# Altium PCB Copy of AT long bus (13.3 x 4.2 inches).PCBDOC
Units mm, origin at the board's own origin, x right, y up, seen from the top; angles counter-clockwise.
Board outline 100 x 50 mm, 10 copper layers (TopLayer, MidLayer1, MidLayer2, MidLayer3, MidLayer4, MidLayer5, MidLayer6, MidLayer7, MidLayer8, BottomLayer); 21 components, 20 nets, 85 pads, 8 vias.
Unrouted connection lines stored in the file: 15.
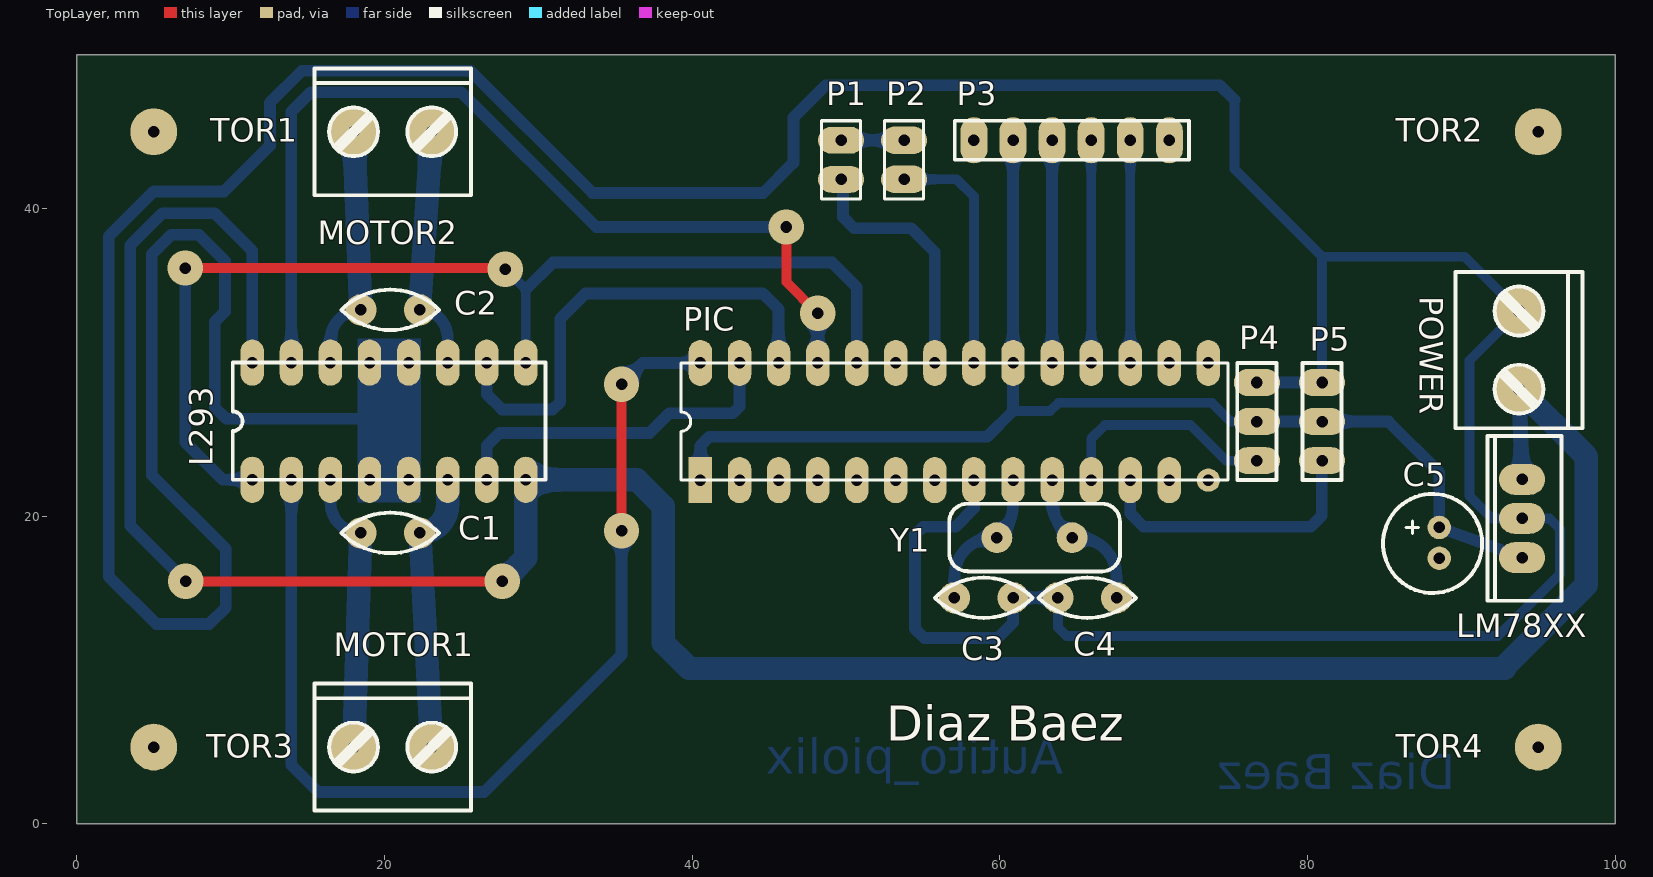
[diagram p0: TopLayer view]
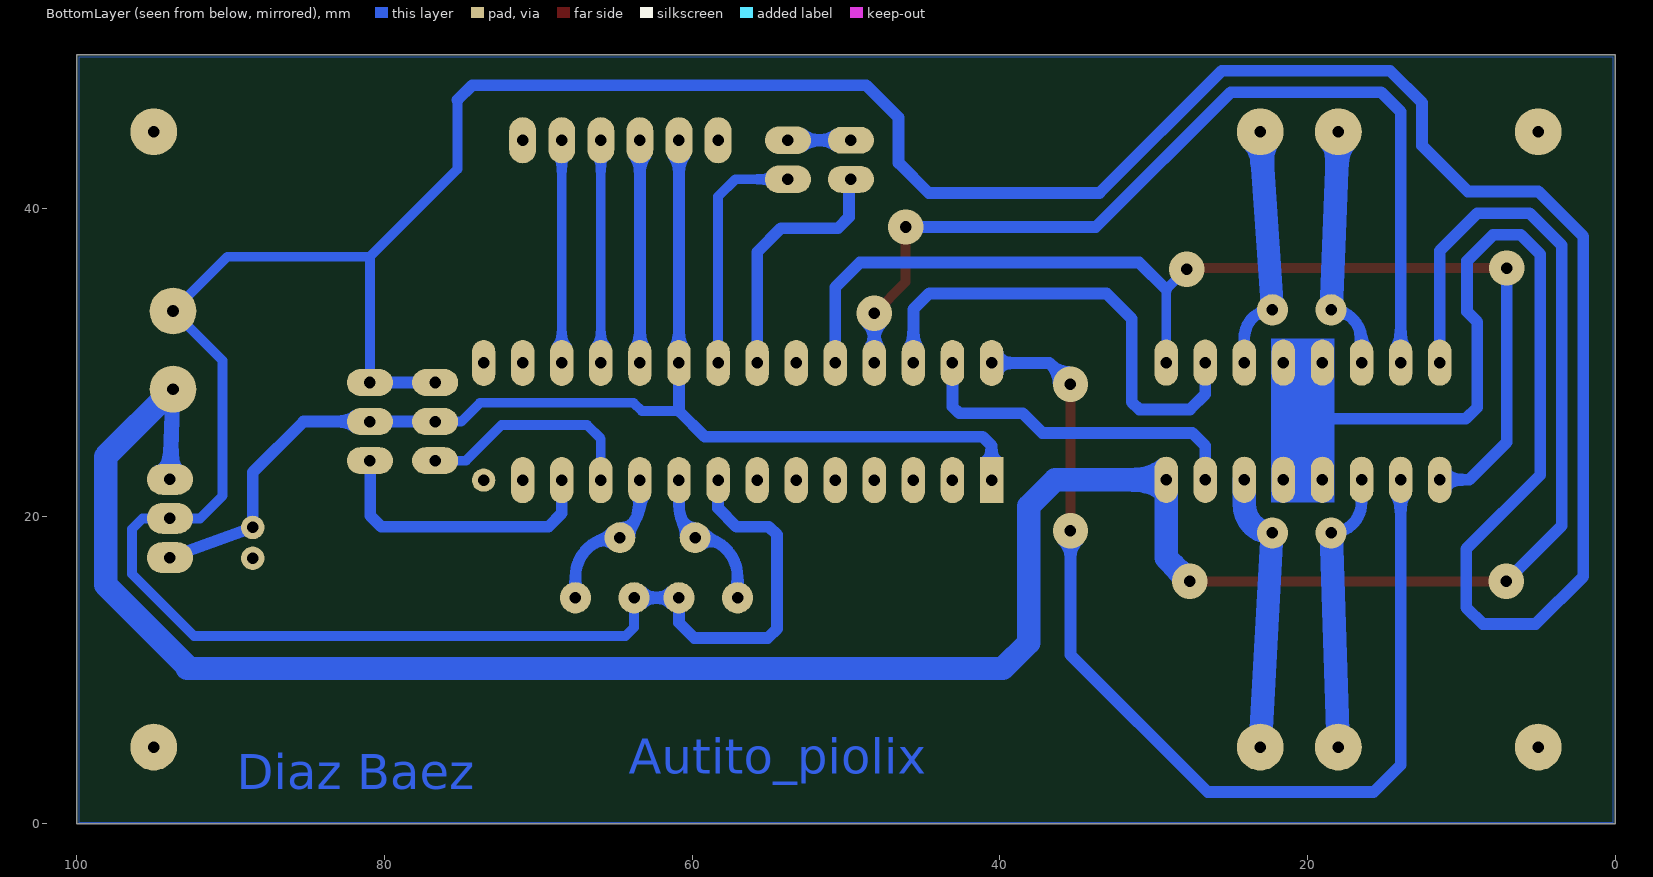
[diagram p1: BottomLayer view, seen from below]

## Layer stack, top to bottom
TopSolder: solder mask 0.0102, Solder Resist, Dk 3.5
TopLayer: signal copper 0.0356
Dielectric1: core 0.32, FR-4, Dk 4.8
MidLayer1: signal copper 0.0356
Dielectric2: prepreg 0.32, FR-4, Dk 4.8
MidLayer2: signal copper 0.0356
Dielectric3: core 0.32, FR-4, Dk 4.8
MidLayer3: signal copper 0.0356
Dielectric4: prepreg 0.32, FR-4, Dk 4.8
MidLayer4: signal copper 0.0356
Dielectric5: core 0.32, FR-4, Dk 4.8
MidLayer5: signal copper 0.0356
Dielectric6: prepreg 0.32, FR-4, Dk 4.8
MidLayer6: signal copper 0.0356
Dielectric7: core 0.32, FR-4, Dk 4.8
MidLayer7: signal copper 0.0356
Dielectric8: prepreg 0.32, FR-4, Dk 4.8
MidLayer8: signal copper 0.0356
Dielectric9: core 0.32, FR-4, Dk 4.8
BottomLayer: signal copper 0.0356
BottomSolder: solder mask 0.0102, Solder Resist, Dk 3.5

## Board outline
0,0 100,0 100,50 0,50

## Design rules (kind name [scope] priority, off if disabled: settings)
Clearance [All] p1: gap=0.635 ignorepadtopadclearanceinfootprint=FALSE
FabricationTestPointUsage TestPointUsage [All] p1: valid=0 allowmultiple=FALSE
FabricationTestpoint Testpoint [All] p1: side=3 testpointundercomponent=TRUE minsize=1.016 maxsize=2.54 preferedsize=1.524 minholesize=0.508 maxholesize=1.016 preferedholesize=0.813 testpointgrid=0.025 allowsidetop=TRUE allowsidebottom=TRUE usegrid=TRUE gridtolerance=0
PasteMaskExpansion PasteMaskExpansion_1 [InComponent('P1')] p1: expansion=-3.81
PasteMaskExpansion [All] p2: expansion=0
PlaneClearance [All] p1: clearance=0.254
PolygonConnect [All] p1: connectstyle=Relief reliefconductorwidth=0.254 reliefentries=4 polygonreliefangle="90 Angle" airgapwidth=0.254
RoutingVias [All] p1: holewidth=0.711 width=1.27 viastyle="Through Hole" minholewidth=0.711 minwidth=1.27 maxholewidth=0.711 maxwidth=1.27
SilkToSolderMaskClearance SilkscreenOverComponentPads [IsPad] p1: minsilkscreentomaskgap=0.254 clearancetoexposedcopper=TRUE
SolderMaskExpansion [All] p1: expansion=0.051
Width [All] p1: maxlimit=7.62 minlimit=0.508 preferedwidth=0.635
25 further rules are at their usual default settings.

## Classes and differential pairs
component class "AT long bus (13.3 x 4.2 inches)": C1 C2 C3 C4 C5 CI1 MOTOR2 P1 P5 PIC POWER TOR2 TOR3 TOR4 U2 Y1

## Components (designator, comment, footprint, x,y, rotation, side; value= is the part's Value field where it differs from the comment)
C1 "100nF" CAP0.15 18.466,18.923 r270 top
C2 "100nF" CAP0.15 18.466,33.426 r270 top
C3 "22pF" CAP0.15 60.858,14.707 r90 top
C4 "22pF" CAP0.15 63.779,14.707 r270 top
C5 "Cap Pol" "ELECTROLITICO 5X10" 88.57,19.279 r270 top value=220uF
L293 "L293" DIP16 11.405,22.377 r90 top (schematic designator CI1)
LM78XX "LM78LXX" TO220 93.955,19.863 r90 top (schematic designator U2)
MOTOR1 "MOTOR1" "BORNERA2 azul" 17.989,5 r0 top (schematic designator P1)
MOTOR2 "MOTOR2" "BORNERA2 azul" 17.989,45 r0 top (schematic designator P2)
P1 "LUZ2" HEADER1X2#1 49.682,41.91 r90 top (schematic designator P11)
P2 "LUZ1" HEADER1X2#2 53.772,41.91 r90 top (schematic designator P10)
P3 "HC-05" "Header 1X6" 71.018,44.45 r180 top (schematic designator P4)
P4 "SERVO1" "Header 1X3" 76.708,23.622 r90 top (schematic designator P8)
P5 "SERVO2" "Header 1X3" 80.95,23.622 r90 top (schematic designator P9)
PIC "PIC16F876A-I/SO" DIP28 40.538,22.352 r90 top (schematic designator U1)
POWER "POWER IN" "BORNERA2 azul" 93.751,33.35 r270 top (schematic designator P12)
TOR1 "POWER IN" TORNILLO 5,45 r0 top (schematic designator P3)
TOR2 "POWER IN" TORNILLO 95,45 r0 top (schematic designator P5)
TOR3 "POWER IN" TORNILLO 5,5 r0 top (schematic designator P7)
TOR4 "POWER IN" TORNILLO 95,5 r0 top (schematic designator P6)
Y1 "5M" HP49-S 59.814,18.618 r0 top

## Footprints (in the part's own frame and the unit in brackets; to place one, negate y for a bottom-side part, rotate by r counter-clockwise, add the part's x,y. Pads: shape width x height; smd on the part's side, far side on the other; paste and mask are expansions set on the pad)
"BORNERA2 azul" [mil]
  round 120 hole 29.53: 1(0,0) 2(200,0)
  silkscreen extent -100,-162 300,162, body extent -117,-122 300,178, height 394
CAP0.15 [mil]
  round 80 hole 29.53: 1(0,0) 2(0,150)
  silkscreen extent -52,-50 52,200, body extent -40,-22 39,172, height 267
DIP16 [mm]
  oval 3x1.524 hole 0.75: 1(0,0) 2(0,-2.54) 3(0,-5.08) 4(0,-7.62) 5(0,-10.16) 6(0,-12.7) 7(0,-15.24) 8(0,-17.78) 9(7.62,-17.78) 10(7.62,-15.24) 11(7.62,-12.7) 12(7.62,-10.16) 13(7.62,-7.62) 14(7.62,-5.08) 15(7.62,-2.54) 16(7.62,0)
  silkscreen extent 0,-19.05 7.62,1.27, body extent -0.04,-19.33 7.72,1.27, height 4.5
DIP28 [mm]
  rect 3x1.524 hole 0.75: 1(0,0)
  oval 3x1.524 hole 0.75: 2(0,-2.54) 3(0,-5.08) 4(0,-7.62) 5(0,-10.16) 6(0,-12.7) 7(0,-15.24) 8(0,-17.78) 9(0,-20.32) 10(0,-22.86) 11(0,-25.4) 12(0,-27.94) 13(0,-30.48) 15(7.62,-33.02) 16(7.62,-30.48) 17(7.62,-27.94) 18(7.62,-25.4) 19(7.62,-22.86) 20(7.62,-20.32) 21(7.62,-17.78) 22(7.62,-15.24) 23(7.62,-12.7) 24(7.62,-10.16) 25(7.62,-7.62) 26(7.62,-5.08) 27(7.62,-2.54) 28(7.62,0)
  oval 1.5x1.524 hole 0.75: 14(0,-33.02)
  silkscreen extent 0,-34.29 7.62,1.27, body extent 0.1,-34.06 7.92,0.99, height 4.57
"ELECTROLITICO 5X10" [mil]
  round 60 hole 29.53: 1(0,0) 2(78.74,0)
  silkscreen extent -16,-85 16,-53, body extent -60,-99 139,99, height 123
HEADER1X2#1 [mm] "Connector; Header; 2 Position"
  oval 1.75x3 hole 0.75: 1(0,0) 2(2.54,0)
  silkscreen extent -1.27,-1.27 3.81,1.27, body extent -1.27,-1.27 3.81,1.27, height 8.44
HEADER1X2#2 [mm] "Connector; Header; 2 Position"
  oval 1.784x3 hole 0.75: 1(0,0) 2(2.54,0)
  silkscreen extent -1.27,-1.27 3.81,1.27, body extent -1.27,-1.27 3.81,1.27, height 8.44
"Header 1X3" [mm]
  oval 1.75x3 hole 0.75: 1(0,0) 2(2.54,0) 3(5.08,0)
  silkscreen extent -1.27,-1.27 6.35,1.27, body extent -1.27,-1.52 6.35,1.4, height 8.51
"Header 1X6" [mm]
  oval 1.75x3 hole 0.75: 1(0,0) 2(2.54,0) 3(5.08,0) 4(7.62,0) 5(10.16,0) 6(12.7,0)
  silkscreen extent -1.27,-1.27 13.95,1.27, body extent -1.27,-1.52 13.97,1.4, height 8.51
HP49-S [mm]
  round 2 hole 0.75: 1(0,0) 2(4.88,0)
  silkscreen extent -3.1,-2.2 8,2.2, body extent -3.23,-2.33 8.12,2.32, height 3.5
TO220 [mm]
  oval 2x3 hole 0.75: 1(-2.54,0) 2(0,0) 3(2.54,0)
  silkscreen extent -5.35,-2.55 5.35,2.25, body extent -4.95,-2.09 4.95,2.41, height 25.66
TORNILLO [mil]
  round 120 hole 29.53: 1(0,0)
  body extent -110,-114 110,107, height 94

## Part data
C1 C2 C3 C4: library part CAP
C5: "Polarized Capacitor (Surface Mount)", LatestRevisionDate=17-Jul-2002, LatestRevisionNote="Re-released for DXP Platform.", PackageReference=C0805, Published=8-Jun-2000, Publisher="Altium Limited"
L293: "Driver_Motor", Code_JEDEC=SOT-23, LatestRevisionDate=17-Jul-2002, LatestRevisionNote="Re-released for DXP Platform.", PackageReference=SOT-23B, Published=8-Jun-2000, Publisher="Altium Limited"
MOTOR1 MOTOR2 P1 P2 POWER: library part "Header 2", "Header, 2-Pin", LatestRevisionDate=17-Jul-2002, LatestRevisionNote="Re-released for DXP Platform.", Publisher="Altium Limited"
P3: library part "Header 6", "Header, 6-Pin", LatestRevisionDate=17-Jul-2002, LatestRevisionNote="Re-released for DXP Platform.", Publisher="Altium Limited"
P4 P5: library part "Header 3", "Header, 3-Pin", LatestRevisionDate=17-Jul-2002, LatestRevisionNote="Re-released for DXP Platform.", Publisher="Altium Limited"
PIC: "Enhanced FLASH Microcontroller, 8K (x14-Bit words) FLASH, 368 Bytes RAM, 28-Pin SOIC, Standard VDD Range, Industrial Temperature", Supplier Part Number 1=PIC16F876A-I/SO-ND, Code_JEDEC=MS-013, ComponentAvailability="Unknown. Contact manufacturer to determine status.", ComponentLink1Description=Datasheet, ComponentLink1URL=http://ww1.microchip.com/downloads/en/DeviceDoc/39582b.pdf, ComponentLink2Description="Packaging Specification", ComponentLink2URL=http://www.microchip.com/stellent/groups/techpub_sg/documents/packagingspec/en012702.pdf, ComponentLink3Description="Microchip.com Home", ComponentLink3URL=http://www.microchip.com/, DatasheetVersion="revB, Oct-2003", LatestRevisionDate=29-Jan-2009, LatestRevisionNote="Sch. layout revised. 3D Model Removed.", PackageDescription="28-Lead Plastic Small Outline (SO) - Wide 7.50mm Body [SOIC]", PackageReference=SOIC-SO28, PackageVersion="revBB, Aug-2009", Published=11-Oct-2004, Publisher="Altium Limited", Supplier 1=Digi-Key, Supplier 2=Farnell, Supplier 3=Farnell, Supplier Part Number 2=9761306, Supplier Part Number 3=1660040
TOR1 TOR2 TOR3 TOR4: library part "Header 1", "Header, 2-Pin", LatestRevisionDate=17-Jul-2002, LatestRevisionNote="Re-released for DXP Platform.", Publisher="Altium Limited"
Y1: library part XTAL, "Crystal Oscillator", LatestRevisionDate=17-Jul-2002, LatestRevisionNote="Re-released for DXP Platform.", PackageReference=R38, Published=8-Jun-2000, Publisher="Altium Limited"

## Via types
v1: diameter 2.3, hole 0.75, TopLayer to BottomLayer, 8 vias

## Nets (pads, with @x,y where several pads share a name; then routed paths per layer and width w, separated by ;. In a path a pad name is that pad's centre, name@x,y a point inside that pad or via, vN(x,y) a via of type N, cw(c..) or ccw(c..) an arc to the next point about the centre after c; other vN are vias at no path point)
+5: C5.1 LM78XX.1 P3.5 P4.2 P5.2 PIC.1 PIC.20 | length 80.2
  BottomLayer w0.635: 60.858,26.848 63.271,26.848 63.805,27.381 73.787,27.381 75.006,26.162 P4.2@76.556,26.162
  BottomLayer w0.762: PIC.1 40.538,24.587 41.123,25.171 59.182,25.171 60.858,26.848 PIC.20 P3.5 ; P4.2@76.556,26.162 P4.2 P5.2 85.268,26.162 88.57,22.86 C5.1 LM78XX.1
GND: C3.1 C4.1 C5.2 L293.4 L293.5 L293.12 L293.13 LM78XX.2 P1.2 P2.2 P3.4 P4.3 P5.3 PIC.8 PIC.19 POWER.1 | length 324.2
  BottomLayer w0.635: C4.1 63.779,12.776 64.338,12.217 92.38,12.217 96.418,16.256 96.418,19.177 95.733,19.863 LM78XX.2 91.999,19.863 90.526,21.336 90.526,30.124 POWER.1 90.221,36.881 80.975,36.881 ; 75.26,47.066 75.26,42.57 80.95,36.881 P5.3
  BottomLayer w0.762: 19.025,26.34 9.703,26.34 8.966,27.076 8.966,32.639 9.627,33.299 9.627,36.617 7.933,38.31 6.139,38.31 4.87,37.041 4.87,22.689 9.677,17.882 9.677,14.072 8.611,13.005 5.156,13.005 2.076,16.085 2.076,38.199 5,41.123 9.576,41.123 12.548,44.094 12.548,46.883 14.636,48.971 25.572,48.971 33.522,41.021 44.628,41.021 46.584,42.977 46.584,45.923 48.692,48.031 74.295,48.031 75.26,47.066 ; P1.2@49.809,44.45 P2.2 ; PIC.8 58.318,20.523 57.125,19.329 55.016,19.329 54.483,18.796 54.483,12.7 55.093,12.09 59.868,12.09 60.858,13.081 C3.1 C4.1 ; PIC.19 P3.4 ; P4.3@76.556,28.702 P5.3
  BottomLayer w1.524: L293.5 L293.4 19.025,26.34 L293.13 L293.12
NetC1_1: C1.1 L293.3 MOTOR1.1 | length 18.5
  BottomLayer w0.762: L293.3 16.485,22.301 16.485,21.412 16.485,20.904 ccw(c18.466,20.904) 18.449,18.923 ccw(c18.466,20.904) C1.1
  BottomLayer w1.524: MOTOR1.1 C1.1@18.449,18.923
NetC1_2: C1.2 L293.6 MOTOR1.2 | length 19.5
  BottomLayer w0.762: L293.6@24.105,21.26 L293.6@24.105,22.301
  BottomLayer w1.524: C1.2 ccw(c22.276,20.752) C1.2@22.304,18.923 ; C1.2@22.304,18.925 C1.2@22.304,18.923 ; MOTOR1.2 C1.2@22.304,18.923 ; L293.6 24.105,21.26 24.105,20.752 cw(c22.276,20.752) C1.2@22.304,18.923
NetC2_1: C2.1 L293.14 MOTOR2.1 | length 16.2
  BottomLayer w0.762: L293.14@16.485,29.921 L293.14 16.485,31.445 cw(c18.466,31.445) C2.1
  BottomLayer w1.524: MOTOR2.1 C2.1
NetC2_2: C2.2 L293.11 MOTOR2.2 | length 16.1
  BottomLayer w0.762: C2.2 cw(c22.276,31.598) 24.105,31.598 L293.11 L293.11@24.105,29.921
  BottomLayer w1.524: C2.2 MOTOR2.2
NetC3_2: C3.2 PIC.9 Y1.1 | length 9.6
  BottomLayer w0.762: C3.2 57.048,16.078 cw(c59.588,16.078) 59.588,18.618 Y1.1 60.114,18.919 ccw(c58.318,20.715) 60.858,20.715 PIC.9
NetC4_2: C4.2 PIC.10 Y1.2 | length 9.9
  BottomLayer w0.762: PIC.10 63.398,20.966 ccw(c65.938,20.966) 64.142,19.17 Y1.2 65.049,18.618 cw(c65.049,16.078) 67.589,16.078 C4.2
NetCI1_1: L293.1 L293.9 PIC.24 | length 72.7
  TopLayer w0.635: v1(7.036,36.144) v1@27.254,36.144 ; v1@27.178,36.22 v1@27.254,36.144 ; v1@27.661,36.144 v1@27.254,36.144 ; v1(27.838,36.068) 27.33,36.068 v1@27.254,36.144
  BottomLayer w0.635: v1(27.838,36.068) 27.864,36.068 29.185,34.747 ; L293.9 29.185,34.747 ; 29.185,34.874 29.185,34.747
  BottomLayer w0.762: v1(7.036,36.144) 7.036,24.816 9.474,22.377 L293.1 ; 29.185,34.747 30.937,36.5 49.098,36.5 50.698,34.9 PIC.24
NetCI1_2: L293.2 PIC.28 | length 67.7
  TopLayer w0.635: v1(35.408,19.075) v1(35.408,28.6)
  BottomLayer w0.762: L293.2 13.945,3.835 15.701,2.079 19.199,2.079 19.203,2.083 21.855,2.083 21.859,2.079 26.488,2.079 35.408,10.998 v1(35.408,19.075) ; v1(35.408,28.6) 36.779,29.972 PIC.28
NetCI1_7: L293.7 PIC.27 | length 22.5
  BottomLayer w0.762: L293.7 26.645,24.587 27.483,25.425 37.236,25.425 38.506,26.695 42.647,26.695 43.078,27.127 PIC.27
NetCI1_10: L293.10 PIC.26 | length 31.6
  BottomLayer w0.762: L293.10 26.645,27.94 27.635,26.949 30.937,26.949 31.42,27.432 31.42,32.842 33.071,34.493 44.577,34.493 45.618,33.452 PIC.26
NetCI1_15: L293.15 PIC.25 | length 62.3
  TopLayer w0.635: v1(46.126,38.811) 46.126,35.23 v1(48.158,33.198)
  BottomLayer w0.762: L293.15 13.945,46.304 15.215,47.574 24.994,47.574 33.757,38.811 v1(46.126,38.811) ; PIC.25 v1(48.158,33.198)
NetP4_2: P3.2 PIC.17 | length 14.5
  BottomLayer w0.635: PIC.17 P3.2
NetP4_3: P3.3 PIC.18 | length 14.5
  BottomLayer w0.635: PIC.18 P3.3
NetP8_1: P4.1 PIC.11 | length 14.6
  BottomLayer w0.635: PIC.11 65.938,25.044 66.827,25.933 72.397,25.933 74.708,23.622 P4.1@76.556,23.622
NetP9_1: P5.1 PIC.12 | length 18.8
  BottomLayer w0.762: PIC.12 68.478,20.193 69.342,19.329 80.213,19.329 80.924,20.041 P5.1@80.924,23.622
NetP10_1: P2.1 PIC.21 | length 15.9
  BottomLayer w0.635: P2.1 57.201,41.91 58.318,40.792 PIC.21
  BottomLayer w0.762: PIC.21 ccw(c58.318,29.997) PIC.21@58.344,29.997
NetP11_1: P1.1 PIC.22 | length 16.8
  BottomLayer w0.762: P1.1 49.809,41.783 49.809,39.446 50.521,38.735 54.229,38.735 55.778,37.186 PIC.22 cw(c55.778,30.048) PIC.22@55.702,30.048
VCC: L293.8 L293.16 LM78XX.3 POWER.2 | length 170.2
  TopLayer w0.635: v1(7.087,15.773) v1(27.661,15.773)
  BottomLayer w0.762: v1(7.087,15.773) 3.473,19.387 3.473,37.62 5.56,39.707 8.959,39.707 11.405,37.262 L293.16
  BottomLayer w1: POWER.2 LM78XX.3
  BottomLayer w1.524: v1(27.661,15.773) 29.185,17.297 L293.8 36.398,22.377 38.125,20.65 38.125,11.786 39.802,10.109 92.837,10.109 92.837,10.25 98.133,15.546 98.133,23.889 POWER.2
pads on no net: P3.1 P3.6 PIC.2 PIC.3 PIC.4 PIC.5 PIC.6 PIC.7 PIC.13 PIC.14 PIC.15 PIC.16 PIC.23 TOR1.1 TOR2.1 TOR3.1 TOR4.1

## Polygon pours and split planes (outlines as drawn)
GND on BottomLayer "GND_L10_P021" (solid, shelved, pour order 21): 0.127,0.127 0.127,49.86 99.873,49.86 99.873,0.127
GND on BottomLayer "GND_L10_P017" (solid, shelved, pour order 17): 0.127,0.127 0.127,49.86 99.873,49.86 99.873,0.127
no net on BottomLayer "BottomLayer-No Net" (solid, pour order 15): -0.508,49.733

## Other copper
BottomLayer:
  rectangle net GND: 18.237,20.904 22.377,31.547
  text "Autito_piolix" at 64.11,3.277 h2.29
  text "Diaz Baez" at 89.611,2.261 h2.29

## Silkscreen, mask and mechanical layers (free items; w line width, h text height)
TopOverlay:
  circle w0.254: c88.138,18.237 r3.221
  text "Diaz Baez" at 52.603,5.41 h2.29
Mechanical1:
  the board outline again, w0.254